# Altium PCB PCB2.PcbDoc
Units mm, origin at the board's own origin, x right, y up, seen from the top; angles counter-clockwise.
Board outline 77.72 x 34.29 mm, 2 copper layers (Top Layer, Bottom Layer); 29 components, 13 nets, 66 pads, 0 vias.
Unrouted connection lines stored in the file: 4.
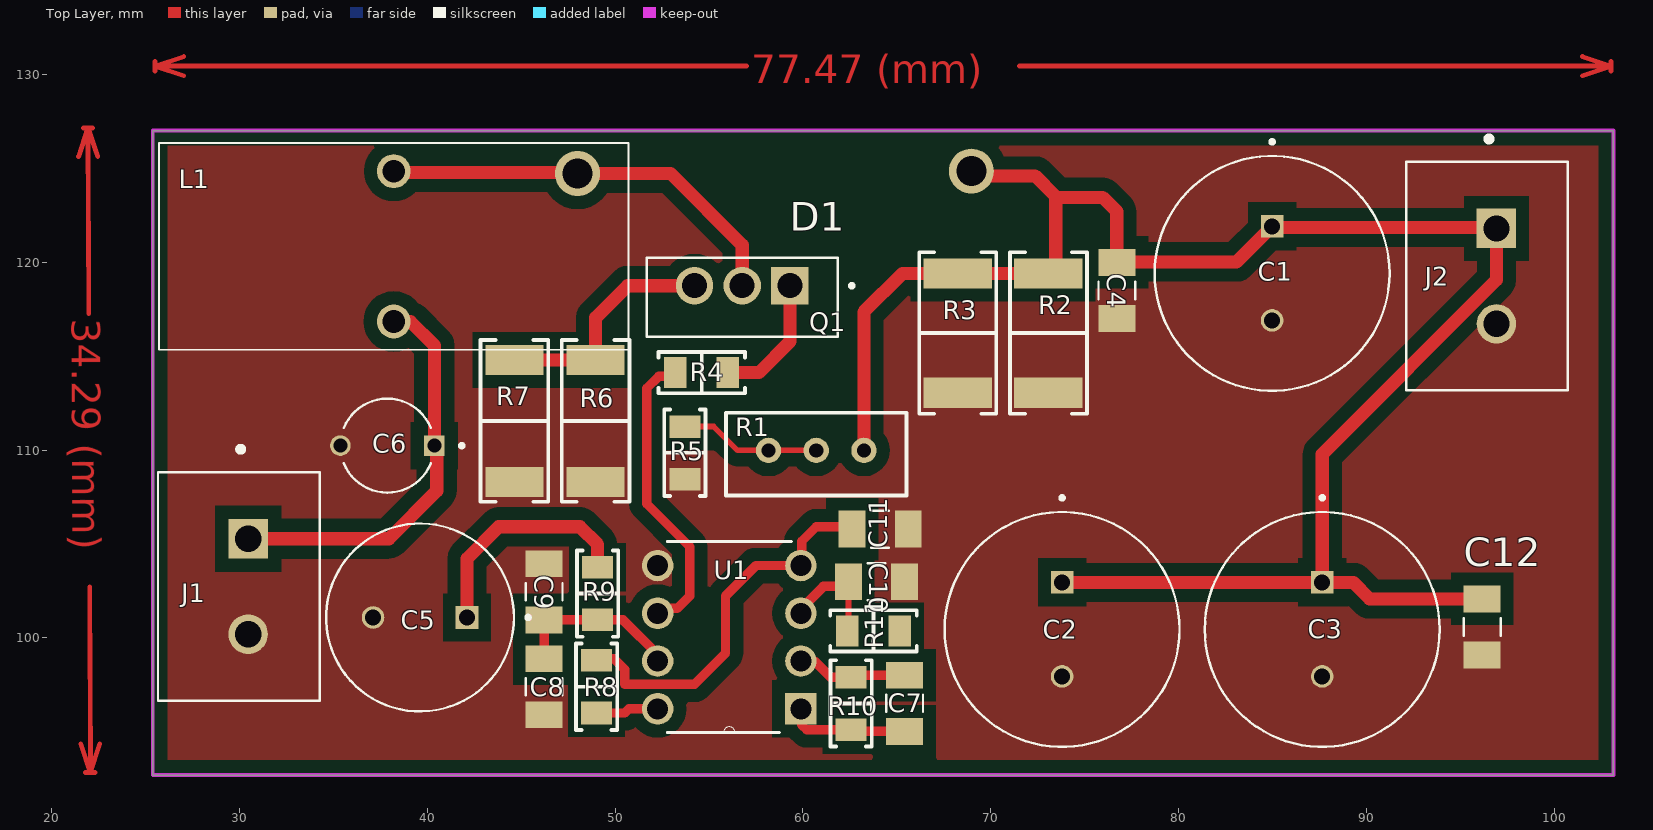
[diagram p0: Top Layer view]
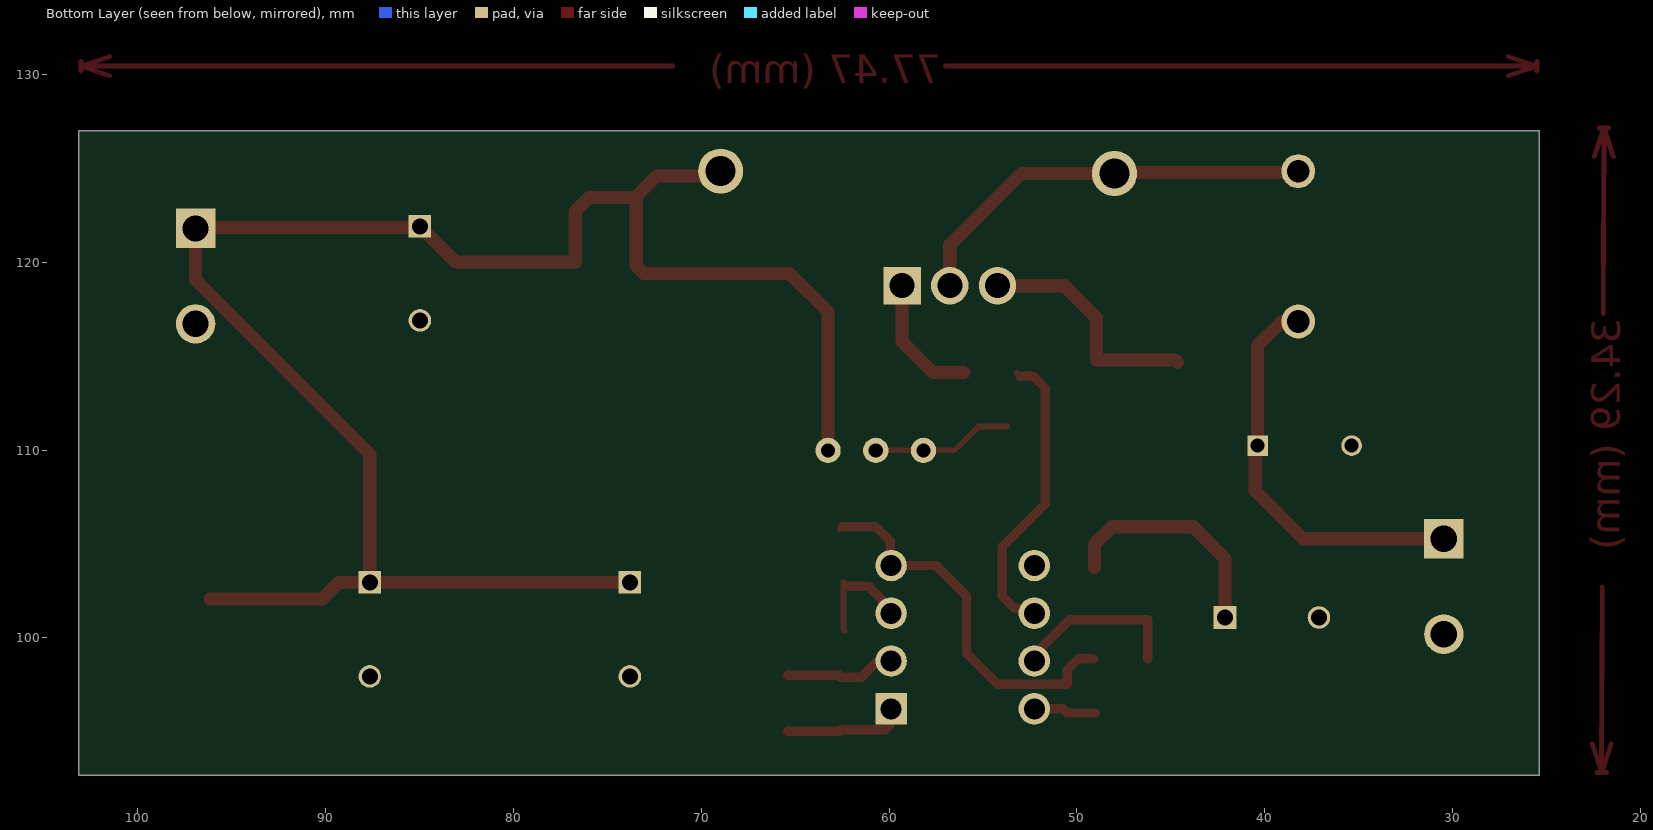
[diagram p1: Bottom Layer view, seen from below]
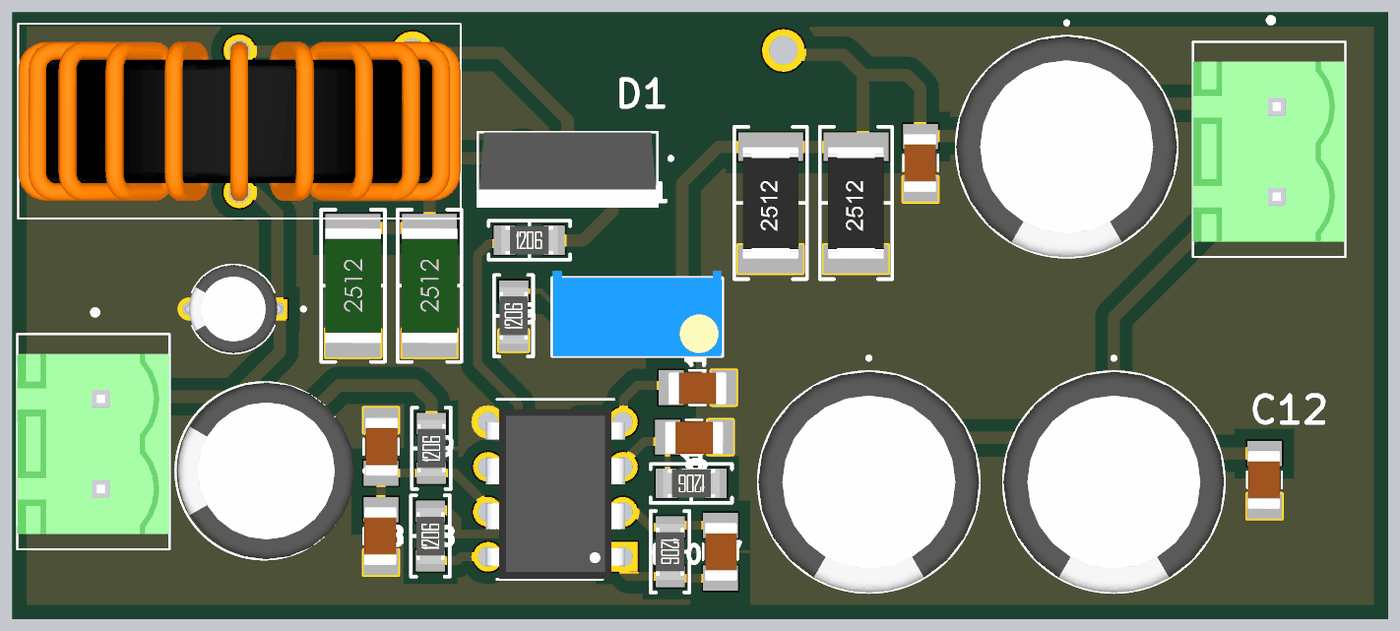
[diagram p2: 3D render of the assembled board from above, using the file's embedded part models]

## Layer stack, top to bottom
Top Solder: solder mask 0.0102, Solder Resist, Dk 3.5
Top Layer: signal copper 0.0356
Dielectric 1: dielectric 0.32, FR-4, Dk 4.8
Bottom Layer: signal copper 0.0356
Bottom Solder: solder mask 0.0102, Solder Resist, Dk 3.5

## Board outline
25.4,92.71 25.4,127 103.124,127 103.124,92.71

## Design rules (kind name [scope] priority, off if disabled: settings)
Clearance [All] p1: gap=0.7 ignorepadtopadclearanceinfootprint=FALSE except(0: Arc-Hole Track-Hole SMDPad-Hole THPad-Hole Via-Hole Fill-Hole Poly-Hole Region-Hole Text-Hole; 0.254: Arc-THPad Track-THPad SMDPad-THPad THPad-THPad)
PolygonConnect [All] p1: connectstyle=Direct reliefconductorwidth=0.254 reliefentries=4 polygonreliefangle="90 Angle" airgapwidth=0.254
RoutingVias [All] p1: holewidth=0.711 width=1.27 viastyle="Through Hole" minholewidth=0.711 minwidth=1.27 maxholewidth=0.711 maxwidth=1.27
SolderMaskExpansion [All] p1: expansion=0.102
Width [All] p1: maxlimit=3 minlimit=0.254 preferedwidth=0.7 bottomlayer_maxwidth=0.254 bottomlayer_prefwidth=0.254 minimp=50.000000 maximp=50.000000 favimp=50.000000
30 further rules are at their usual default settings.

## Components (designator, comment, footprint, x,y, rotation, side; value= is the part's Value field where it differs from the comment)
C1 "1000uF_50V" 1000uF_50V 84.836,119.401 r270 top
C2 "1000uF_50V" 1000uF_50V 73.66,100.457 r270 top
C3 "1000uF_50V" 1000uF_50V 87.503,100.457 r270 top
C4 "1uF" C1206_2uF 76.708,118.491 r90 top
C5 "470uF_50V" 470uF_50V 39.497,101.092 r180 top
C6 "1uF_50V" 1uF_50V 37.632,110.363 r180 top
C7 "1nF" C1206_2uF 65.405,96.52 r270 top
C8 "10uF" C1206_2uF 46.228,97.409 r90 top
C9 "10uF" C1206_2uF 46.228,102.454 r270 top
C10 "470pF" C1206_2uF 63.913,102.997 r180 top
C11 "1nF" C1206_2uF 64.103,105.791 r180 top
C12 "100nF" C1206_2uF 96.139,100.584 r90 top
D1 "1N5822" 15SQ045 60.325,124.714 r180 top
J1 "con_5.08" 5.08_con 30.48,102.616 r270 top
J2 "con_5.08" 5.08_con 96.901,119.126 r270 top
L1 "100uH" 7447070 38.481,120.65 r90 top
Q1 "IRFZ44N" IRFZ44N 56.769,118.745 r180 top
R1 "POT_10K" 10K_POT 60.833,109.982 r0 top
R2 "10k" R2512 73.025,116.205 r90 top
R3 "10k" R2512 68.199,116.205 r90 top
R4 "4.7R" 1206_Res 54.737,114.173 r0 top
R5 "1k" 1206_Res 53.669,109.979 r90 top
R6 "0.1R" 2512 49.022,111.506 r90 top
R7 "0.1R" 2512 44.704,111.506 r90 top
R8 "15k" 1206_Res 48.967,97.536 r90 top
R9 "10R" 1206_Res 49.022,102.489 r90 top
R10 "100k" 1206_Res 62.611,96.393 r270 top
R11 "1k" 1206_Res 63.627,100.33 r180 top
U1 "UC3843" UC3843 56.206,99.537 r180 top

## Footprints (in the part's own frame and the unit in brackets; to place one, negate y for a bottom-side part, rotate by r counter-clockwise, add the part's x,y. Pads: shape width x height; smd on the part's side, far side on the other; paste and mask are expansions set on the pad)
1uF_50V [mm]
  rect 1.1x1.1 hole 0.75: 1(-2.754,0.127)
  round 1.1 hole 0.75: 2(2.246,0.127)
  silkscreen extent -4.32,-2.37 2.06,2.63, body extent -3,-2.37 2.5,2.62, height 11
5.08_con [mm]
  rect 2.1x2.1 hole 1.4: 1(-2.667,0)
  round 2.1 hole 1.4: 2(2.413,0)
  silkscreen extent -7.57,-4.8 5.95,3.8, body extent -5.08,-4.81 5.08,3.79, height 12
10K_POT [mm]
  round 1.35 hole 0.75: 1(-2.667,0) 2(-0.127,0) 3(2.413,0)
  silkscreen extent -4.93,-2.4 4.67,2, body extent -4.89,-2.41 4.64,2.41, height 11.56
15SQ045 [mm]
  round 2.4 hole 1.6: 1(-8.636,-0.127) 2(12.319,0)
470uF_50V [mm]
  rect 1.2x1.2 hole 0.85: 1(-2.627,0)
  round 1.2 hole 0.85: 2(2.373,0)
  silkscreen extent -5.98,-5 4.87,5, body extent -5.25,-5 4.75,5, height 20
1000uF_50V [mm]
  round 1.2 hole 0.85: N(2.5,0.127)
  rect 1.2x1.2 hole 0.85: P(-2.5,0.127)
  silkscreen extent -7.1,-6.12 6.25,6.38, body extent -6.25,-6.12 6.25,6.37, height 25
1206_Res [mm]
  rect 1.2x1.65 smd: 1(-1.527,-0.052) 2(1.273,-0.052)
  silkscreen extent -2.43,-1.15 2.17,1.05, body extent -1.73,-0.85 1.47,0.75, height 0.6
2512 [mm]
  rect 1.6x3.1 smd: 1(-3.206,0.055) 2(3.294,0.055)
  silkscreen extent -4.26,-1.74 4.34,1.86, body extent -3.21,-1.52 3.29,1.63, height 0.6
7447070 [mm]
  round 1.8 hole 1.2: 1(-3.81,0.254) 2(4.19,0.254)
  silkscreen extent -5.31,-12.25 5.69,12.75, body extent -13.81,-3.12 6.19,3.63, height 5.8
C1206_2uF [mm]
  rect 1.42x1.96 smd: 1(-1.492,0) 2(1.492,0)
  silkscreen extent -0.46,-0.98 0.46,0.98, body extent -1.65,-0.89 1.65,0.96, height 1.6
IRFZ44N [mm]
  rect 1.995x1.995 / inner round 1.995 / far side rect 1.995x1.995 hole 1.33: 1(-2.54,0)
  round 1.995 hole 1.33: 2(0,0) 3(2.54,0)
  silkscreen extent -5.93,-1.48 5.08,2.72, body extent -5.08,-1.47 5.08,2.72, height 22.86
R2512 [mm]
  rect 1.6x3.65 smd: 1(-3.154,-0.037) 2(3.196,-0.037)
  silkscreen extent -4.28,-2.09 4.32,2.01, body extent -3.13,-1.61 3.17,1.54, height 0.7
UC3843 [mil]
  rect 66x66 hole 44: 1(-145,130)
  round 66 hole 44: 2(-145,30) 3(-145,-70) 4(-145,-170) 5(155,-170) 6(155,-70) 7(155,30) 8(155,130)
  silkscreen extent -125,-220 135,180, body extent -150,-199 160,179, height 200

## Part data
C4 C7 C8 C9 C10 C11 C12: library part C1206_2uf
D1: "Diode; Diode Type:Schottky; Repetitive Reverse Voltage Max, Vrrm:40V; Forward Current, If(AV):3A; Forward Surge Current Max, Ifsm:80A; Forward Voltage Max, VF:0.525V; Junction Temperature, Tj max:125°C ;RoHS Compliant: Yes"
L1: library part 7447070
Q1: "N-Channel 55 V 49A (Tc) 94W (Tc) Through Hole TO-220AB"
R2 R3: library part R2512_1W
R4 R5 R8 R9 R10 R11: library part 1206
R6 R7: library part 2512

## Nets (pads, with @x,y where several pads share a name; then routed paths per layer and width w, separated by ;. In a path a pad name is that pad's centre, name@x,y a point inside that pad or via, vN(x,y) a via of type N, cw(c..) or ccw(c..) an arc to the next point about the centre after c; other vN are vias at no path point)
GND: C1.N C2.N C3.N C4.1 C5.2 C6.2 C8.1 C9.1 C10.1 C11.1 C12.1 J1.2 J2.2 R2.1 R3.1 R5.1 R6.1 R7.1 U1.5
NetC7_1: C7.1 R1.1 R1.2 R5.2 R10.1 U1.2 | length 13.6
  Top Layer w0.3: R5.2 55.245,111.252 56.515,109.982 R1.1 R1.2 ; U1.2@59.985,98.679 U1.2 U1.2@60.61,98.775 ; R10.1 R10.1@62.651,98.012
  Top Layer w0.5: U1.2@60.61,98.775 61.465,97.92 R10.1 ; R10.1@62.651,98.012 C7.1
NetC7_2: C7.2 R10.2 U1.1 | length 6.5
  Top Layer w0.3: U1.1 59.944,96.18 59.944,95.377 ; R10.2 R10.2@62.651,95.028
  Top Layer w0.5: 59.944,95.377 60.201,95.12 R10.2 ; R10.2@62.651,95.028 C7.2
NetC8_2: C8.2 C9.2 R9.1 U1.7 | length 9.2
  Top Layer w0.3: C9.2 C9.2@46.231,100.965 ; R9.1@49.071,100.965 R9.1 ; U1.7 U1.7@52.269,99.115
  Top Layer w0.5: C8.2 C9.2 ; C9.2@46.231,100.965 R9.1@49.071,100.965 ; R9.1 50.422,100.962 U1.7@52.269,99.115
NetC10_2: C10.2 R11.2 U1.3 | length 6
  Top Layer w0.3: U1.3 U1.3@59.889,101.545 ; C10.2@62.167,102.743 C10.2 62.421,100.449 R11.2
  Top Layer w0.5: U1.3@59.889,101.545 61.087,102.743 C10.2@62.167,102.743
NetC11_2: C11.2 R8.2 U1.4 | length 20.7
  Top Layer w0.3: R8.2 49.019,98.895 49.022,98.898 R8.2@49.155,98.898 ; 52.956,97.533 52.959,97.536 ; U1.4 U1.4@59.931,103.897 ; C11.2@62.484,105.918 C11.2
  Top Layer w0.5: R8.2@49.155,98.898 49.946,98.898 50.52,98.324 50.52,97.533 52.956,97.533 ; 52.959,97.536 54.229,97.536 55.88,99.187 55.88,102.235 57.5,103.855 U1.4 ; U1.4@59.931,103.897 59.931,105.143 60.706,105.918 C11.2@62.484,105.918
NetD1_2: D1.2 L1.2 Q1.2 | length 22.6
  Top Layer w0.7: L1.2@37.973,124.84 L1.2 38.29,124.777 47.943,124.777 D1.2 52.959,124.714 56.769,120.904 Q1.2
NetQ1_1: Q1.1 R4.2 | length 7
  Top Layer w0.7: R4.2 57.66,114.121 59.309,115.77 Q1.1
NetQ1_3: Q1.3 R6.2 R7.2 R11.1 | length 12.6
  Top Layer w0.7: R7.2@44.649,114.673 44.776,114.8 R6.2 48.967,117.039 50.673,118.745 Q1.3
NetR4_1: R4.1 U1.6 | length 16
  Top Layer w0.3: U1.6 U1.6@52.532,101.578 ; R4.1@53.008,113.919 R4.1
  Top Layer w0.5: U1.6@52.532,101.578 53.318,101.578 53.975,102.235 53.975,104.856 51.689,107.142 51.689,113.284 52.324,113.919 R4.1@53.008,113.919
NetR8_1: R8.1 U1.8 | length 3.3
  Top Layer w0.5: R8.1 50.52,96.009 50.746,96.235 U1.8
VCC: C5.1 C6.1 J1.1 L1.1 R9.2 | length 34.2
  Top Layer w0.7: J1.1 37.973,105.283 40.513,107.823 40.513,110.109 C6.1 40.386,115.57 39.116,116.84 L1.1@37.973,116.84 ; C5.1 42.124,104.227 43.815,105.918 48.133,105.918 49.074,104.977 R9.2
VOUT: C1.P C2.P C3.P C4.2 C12.2 D1.1 J2.1 R1.3 R2.2 R3.2 | length 100.1
  Top Layer w0.7: R1.3 63.246,117.348 65.299,119.401 R3.2 R2.2 73.451,119.79 73.451,123.491 ; D1.1 69.215,124.587 72.355,124.587 73.451,123.491 ; C2.P C3.P ; C12.2 90.161,102.076 89.28,102.957 C3.P ; 73.451,123.491 73.498,123.444 75.946,123.444 76.694,122.696 76.694,119.98 76.729,120.015 83.077,120.015 C1.P 85.017,121.847 96.847,121.847 J2.1 96.901,119.052 87.63,109.781 C3.P
copper on no net: | length 97.6
  Top Layer w0.254: 21.456,125.613 21.959,127.139 ; 21.572,94.371 22.086,92.849 ; 21.705,127.138 22.213,127.14 ; 21.832,92.848 22.34,92.85 ; 21.995,117.256 21.959,127.139 ; 22.049,102.732 22.086,92.849 ; 22.472,125.617 21.959,127.139 ; 22.588,94.375 22.086,92.849 ; 25.527,130.175 25.527,130.683 ; 27.051,129.921 25.527,130.429 ; 27.051,130.937 25.527,130.429 ; 57,130.429 25.527,130.429 ; 71.524,130.429 102.997,130.429 ; 101.473,129.921 102.997,130.429 ; 101.473,130.937 102.997,130.429 ; 102.997,130.175 102.997,130.683

## Polygon pours and split planes (outlines as drawn)
GND on Top Layer "Top Layer-GND" (solid, remove dead copper, pour order 4): 25.4,127 103.124,127 103.124,92.71 25.4,92.71

## Keep-outs
Top Layer:
  the board outline again, w0.2

## Other copper
Top Layer:
  pour cut-out: 59.182,100.035
  pour cut-out: 58.461,100.203
  text "77.47 (mm)" at 57.254,129.515 h1.52
  text "34.29 (mm)" at 21.082,116.999 h1.52 r270.21